# Altium PCB PCB1.PcbDoc
Units mil, origin at the board's own origin, x right, y up, seen from the top; angles counter-clockwise.
Board outline 3690 x 3285 mil, 2 copper layers (Top Layer, Bottom Layer); 4 components, 0 nets, 12 pads, 0 vias.
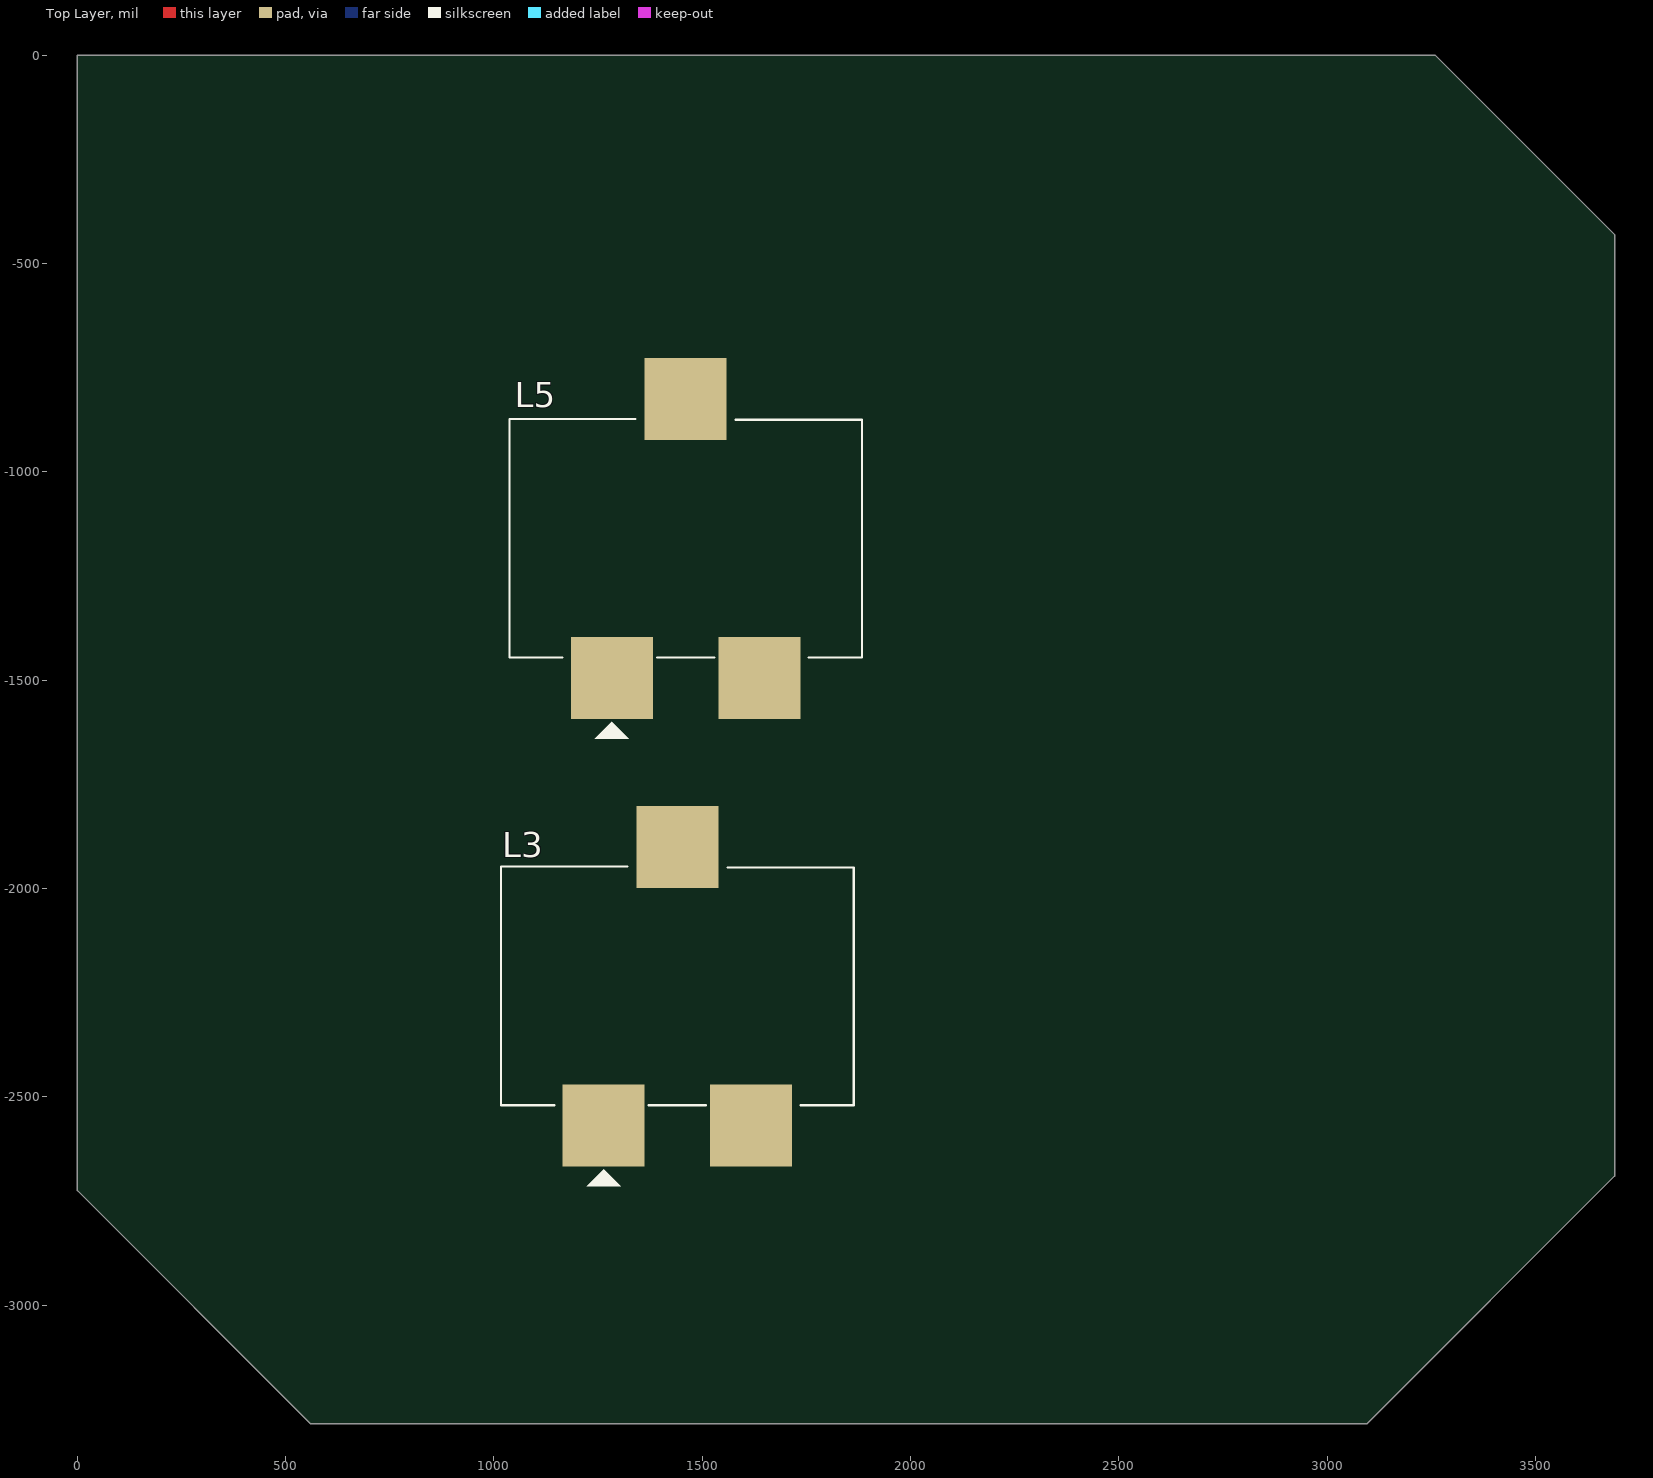
[diagram p0: Top Layer view]
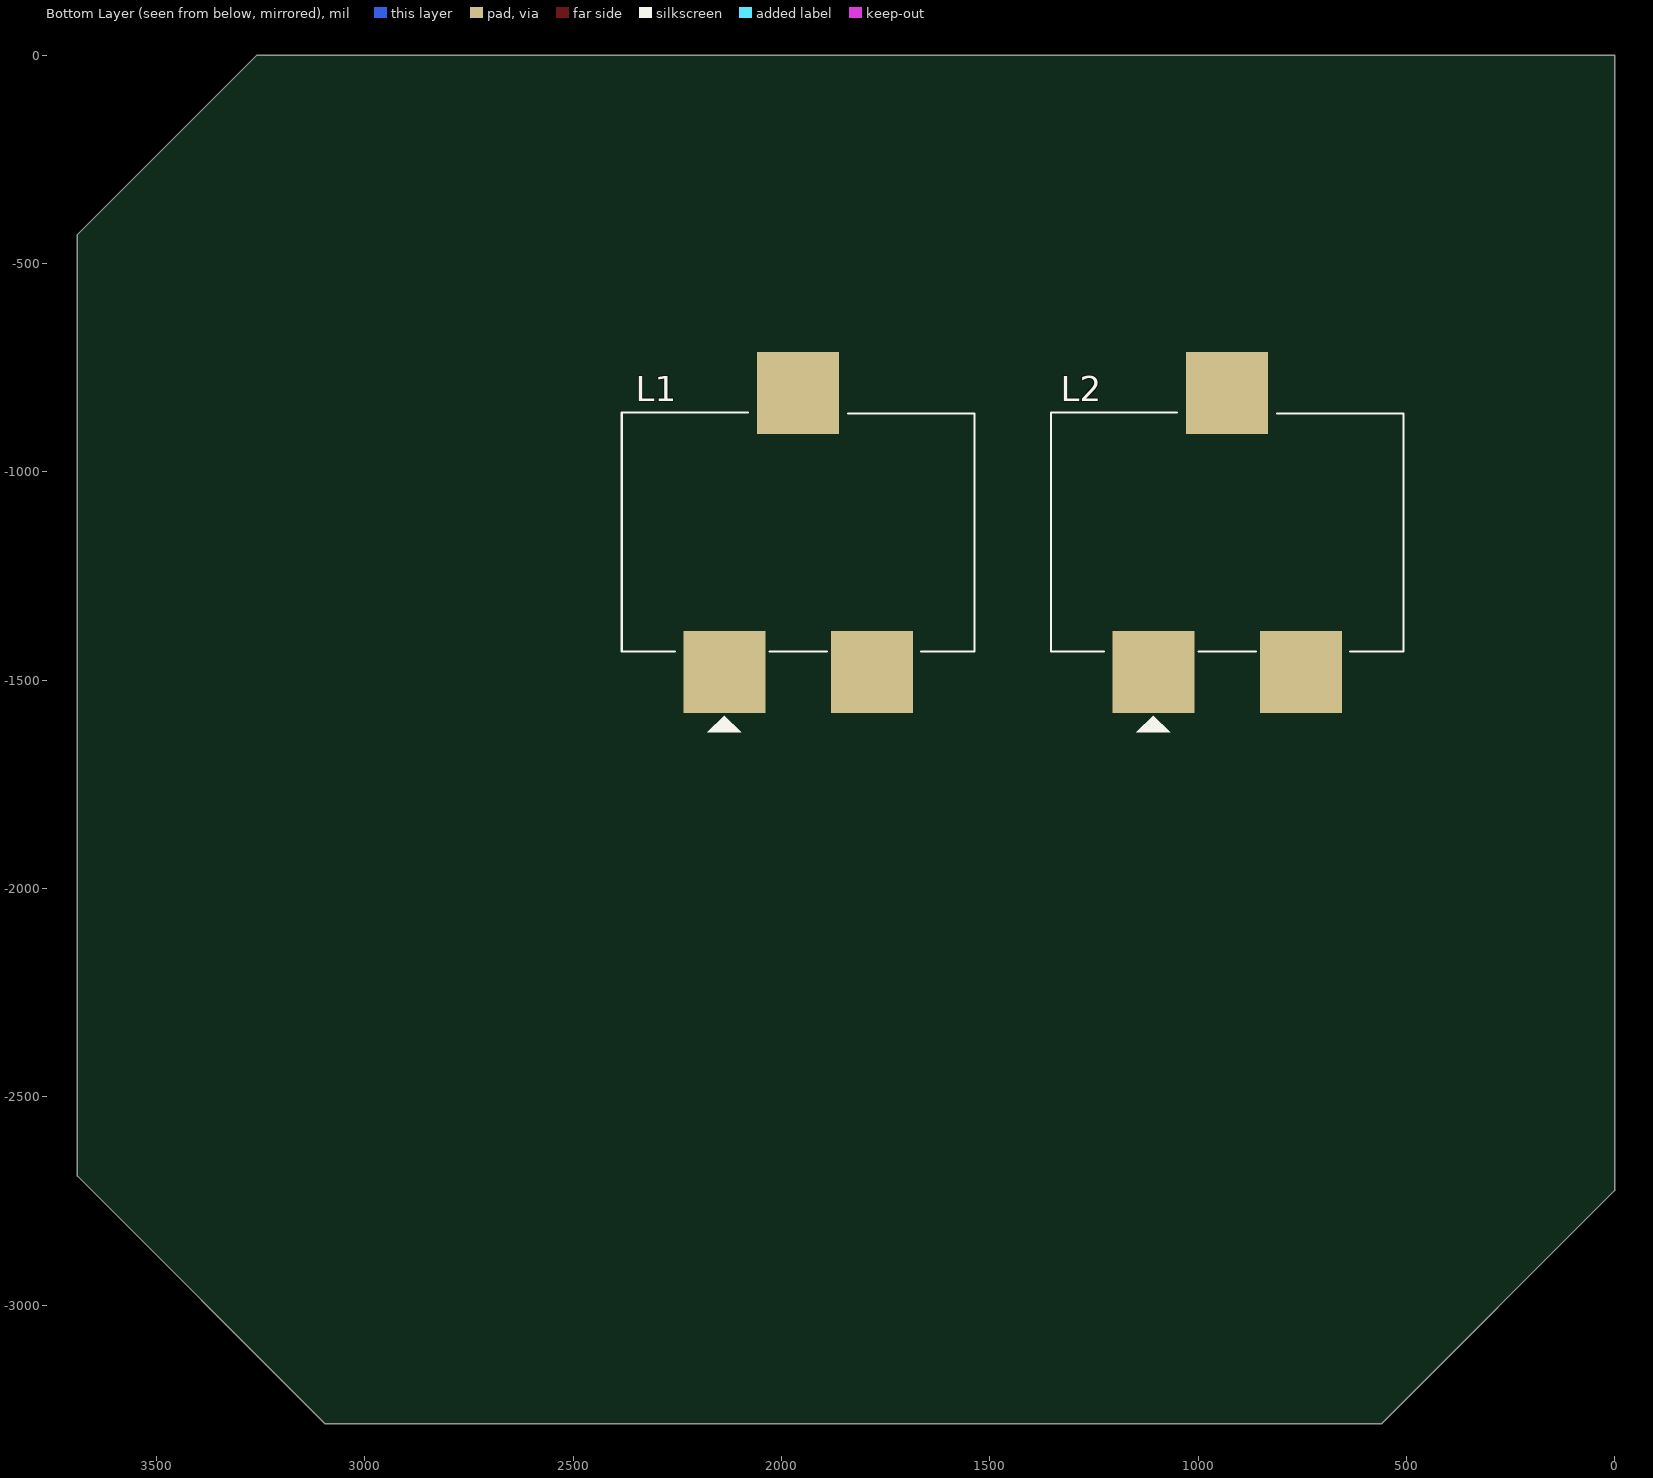
[diagram p1: Bottom Layer view, seen from below]

## Layer stack, top to bottom
Top Solder: solder mask 0.4, Solder Resist, Dk 3.5
Top Layer: signal copper 1.4
Dielectric 1: dielectric 12.6, FR-4, Dk 4.8
Bottom Layer: signal copper 1.4
Bottom Solder: solder mask 0.4, Solder Resist, Dk 3.5

## Board outline
0,-2725 560,-3285 3095,-3285 3690,-2690 3690,-430 3260,0 0,0

## Design rules (kind name [scope] priority, off if disabled: settings)
Clearance [All] p1: gap=10 ignorepadtopadclearanceinfootprint=FALSE except(0: Arc-Hole Track-Hole SMDPad-Hole THPad-Hole Via-Hole Fill-Hole Poly-Hole Region-Hole Text-Hole)
PolygonConnect [All] p1: connectstyle=Relief reliefconductorwidth=10 reliefentries=4 polygonreliefangle="90 Angle" airgapwidth=10
RoutingVias [All] p1: holewidth=28 width=50 viastyle="Through Hole" minholewidth=28 minwidth=50 maxholewidth=28 maxwidth=50
SolderMaskExpansion [All] p1: expansion=4
Width [All] p1: maxlimit=10 minlimit=10 preferedwidth=10
30 further rules are at their usual default settings.

## Components (designator, comment, footprint, x,y, rotation, side; value= is the part's Value field where it differs from the comment)
L1 "7443633300" 7443633300 1960,-1145 r180 bottom value=33µH
L2 "7443633300" 7443633300 930,-1145 r180 bottom value=33µH
L3 "7443633300" 7443633300 1440.31,-2234.65 r0 top value=33µH
L5 "7443633300" 7443633300 1460,-1160 r0 top value=33µH

## Footprints (in the part's own frame and the unit in brackets; to place one, negate y for a bottom-side part, rotate by r counter-clockwise, add the part's x,y. Pads: shape width x height; smd on the part's side, far side on the other; paste and mask are expansions set on the pad)
7443633300 [mm] "FIXED IND 33UH 12A 11.4 MOHM SMD"
  rect 5x5 smd mask+0.05: 0(0,8.5) 1(-4.5,-8.5) 2(4.5,-8.5)
  silkscreen extent -10.75,-12.2 10.75,7.3, body extent -10.75,-10.6 10.75,10.4, height 14

## Part data
L1 L2 L3 L5: library part CMP-ROOT-00000-5, "FIXED IND 33UH 12A 11.4 MOHM SMD", Current - Saturation=11A, Current Rating=12A, Frequency - Self Resonant=12MHz, Inductance Frequency - Test="100 kHz", Manufacturer="Wurth Electronics", Supplier Part Number 1=732-2524-1-ND, Tolerance=±15%, ComponentLink1Description=Datasheet, ComponentLink1URL=https://katalog.we-online.de/pbs/datasheet/7443633300.pdf, Component Name=7443633300, DCR="11.4 mOhm", Manufacturer Part Number=7443633300, part_no=123456, Source=Schlib1_Test.SchLib, Supplier 1=Digi-Key

## Nets (pads, with @x,y where several pads share a name; then routed paths per layer and width w, separated by ;. In a path a pad name is that pad's centre, name@x,y a point inside that pad or via, vN(x,y) a via of type N, cw(c..) or ccw(c..) an arc to the next point about the centre after c; other vN are vias at no path point)
pads on no net: L1.0 L1.1 L1.2 L2.0 L2.1 L2.2 L3.0 L3.1 L3.2 L5.0 L5.1 L5.2

## Silkscreen, mask and mechanical layers (free items; w line width, h text height)
Board:
  the board outline again, w10